# Altium PCB PCB1.PcbDoc
Units mil, origin at the board's own origin, x right, y up, seen from the top; angles counter-clockwise.
Board outline 3500 x 3500 mil, 4 copper layers (Top Layer, Ground 1, Ground 2, Bottom Layer), stack 70.112 mil thick; 73 components, 42 nets, 269 pads, 67 vias.
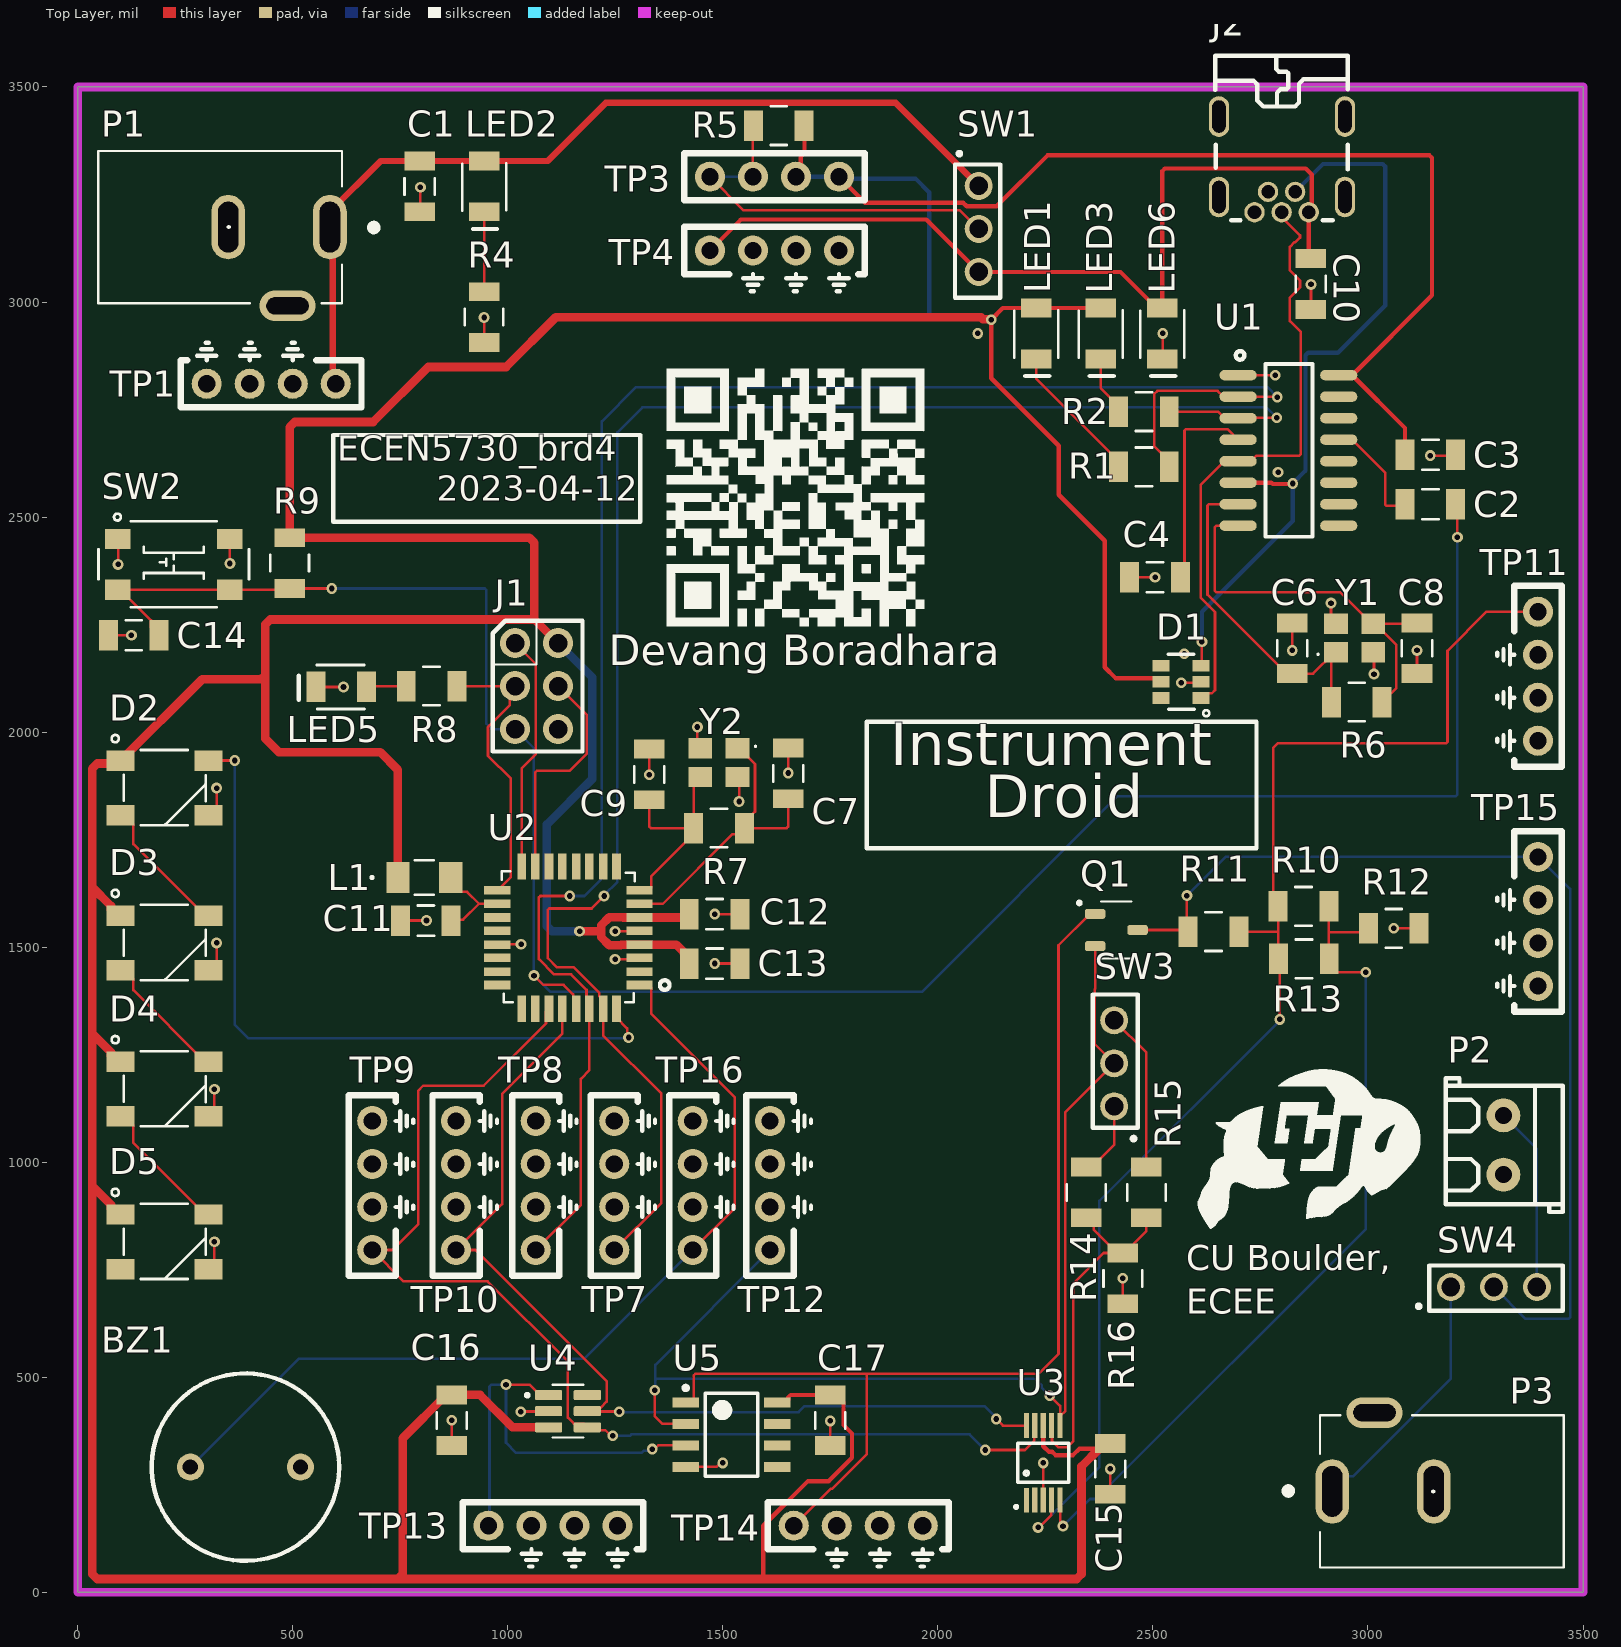
[diagram p0: Top Layer view]
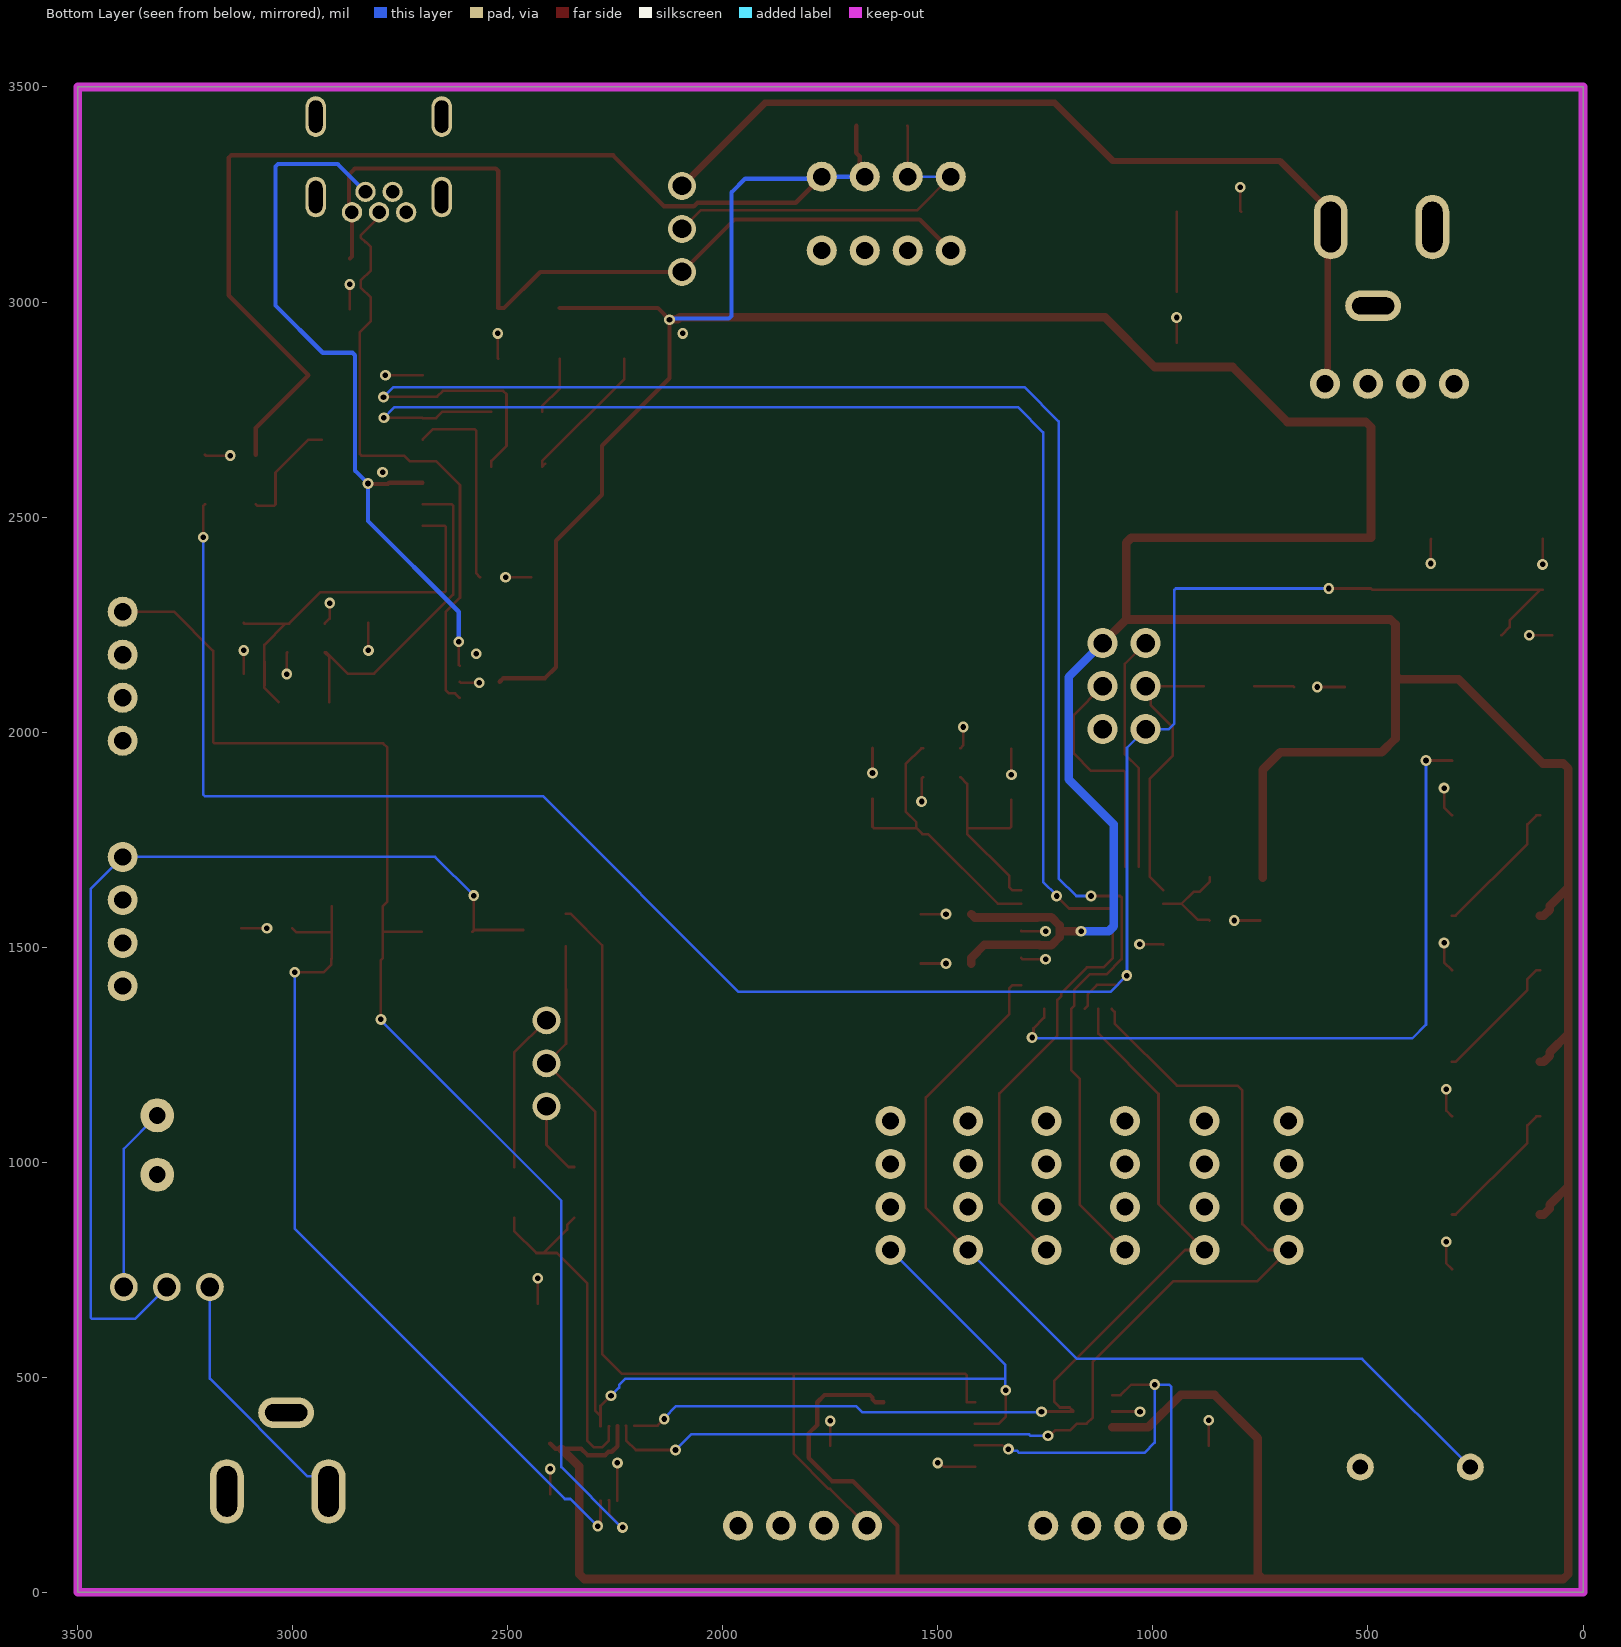
[diagram p1: Bottom Layer view, seen from below]
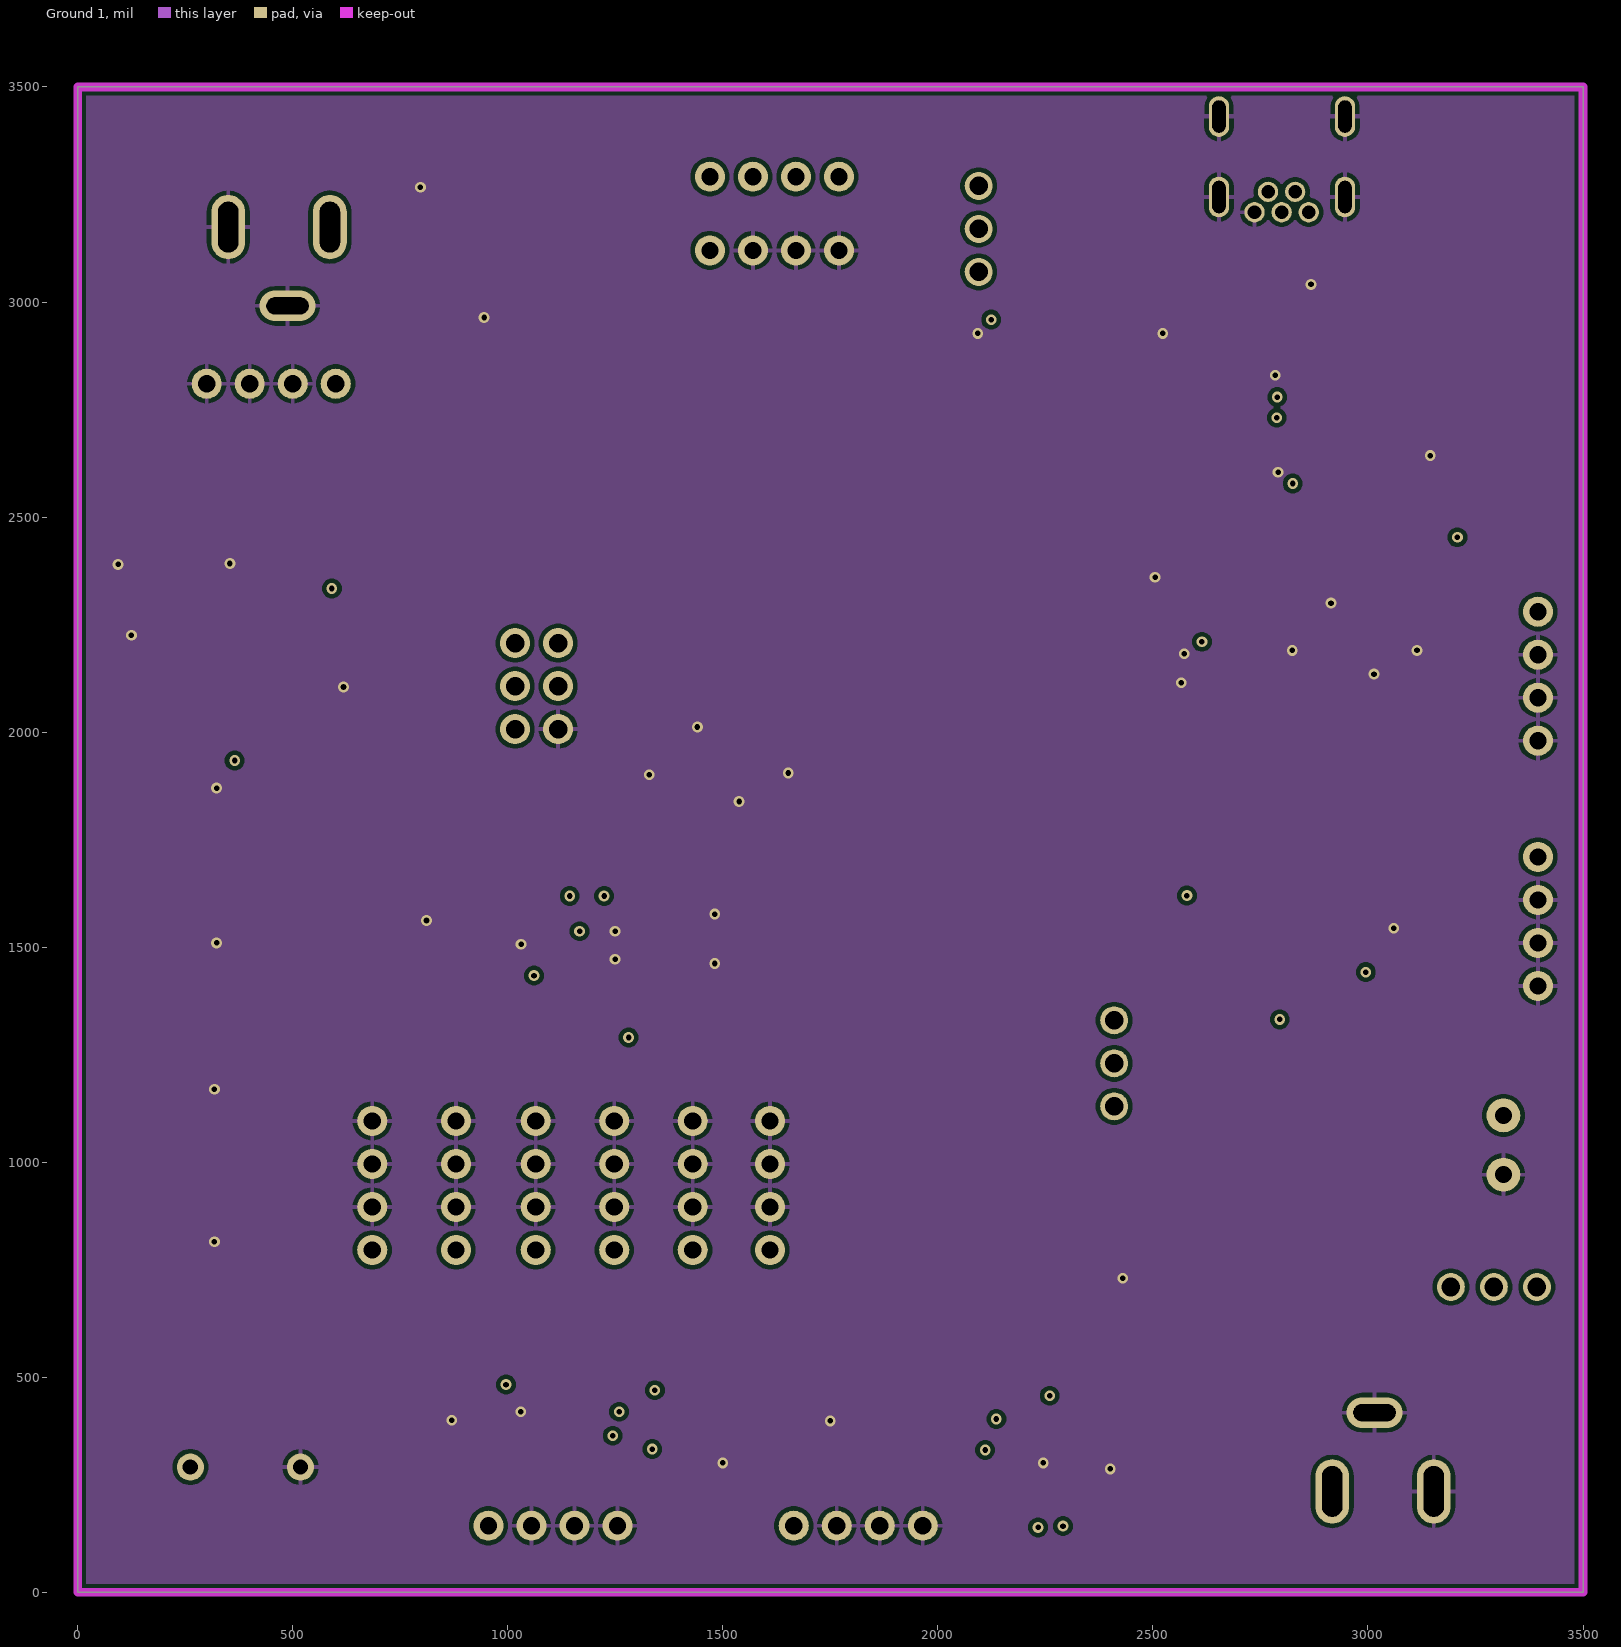
[diagram p2: Ground 1]
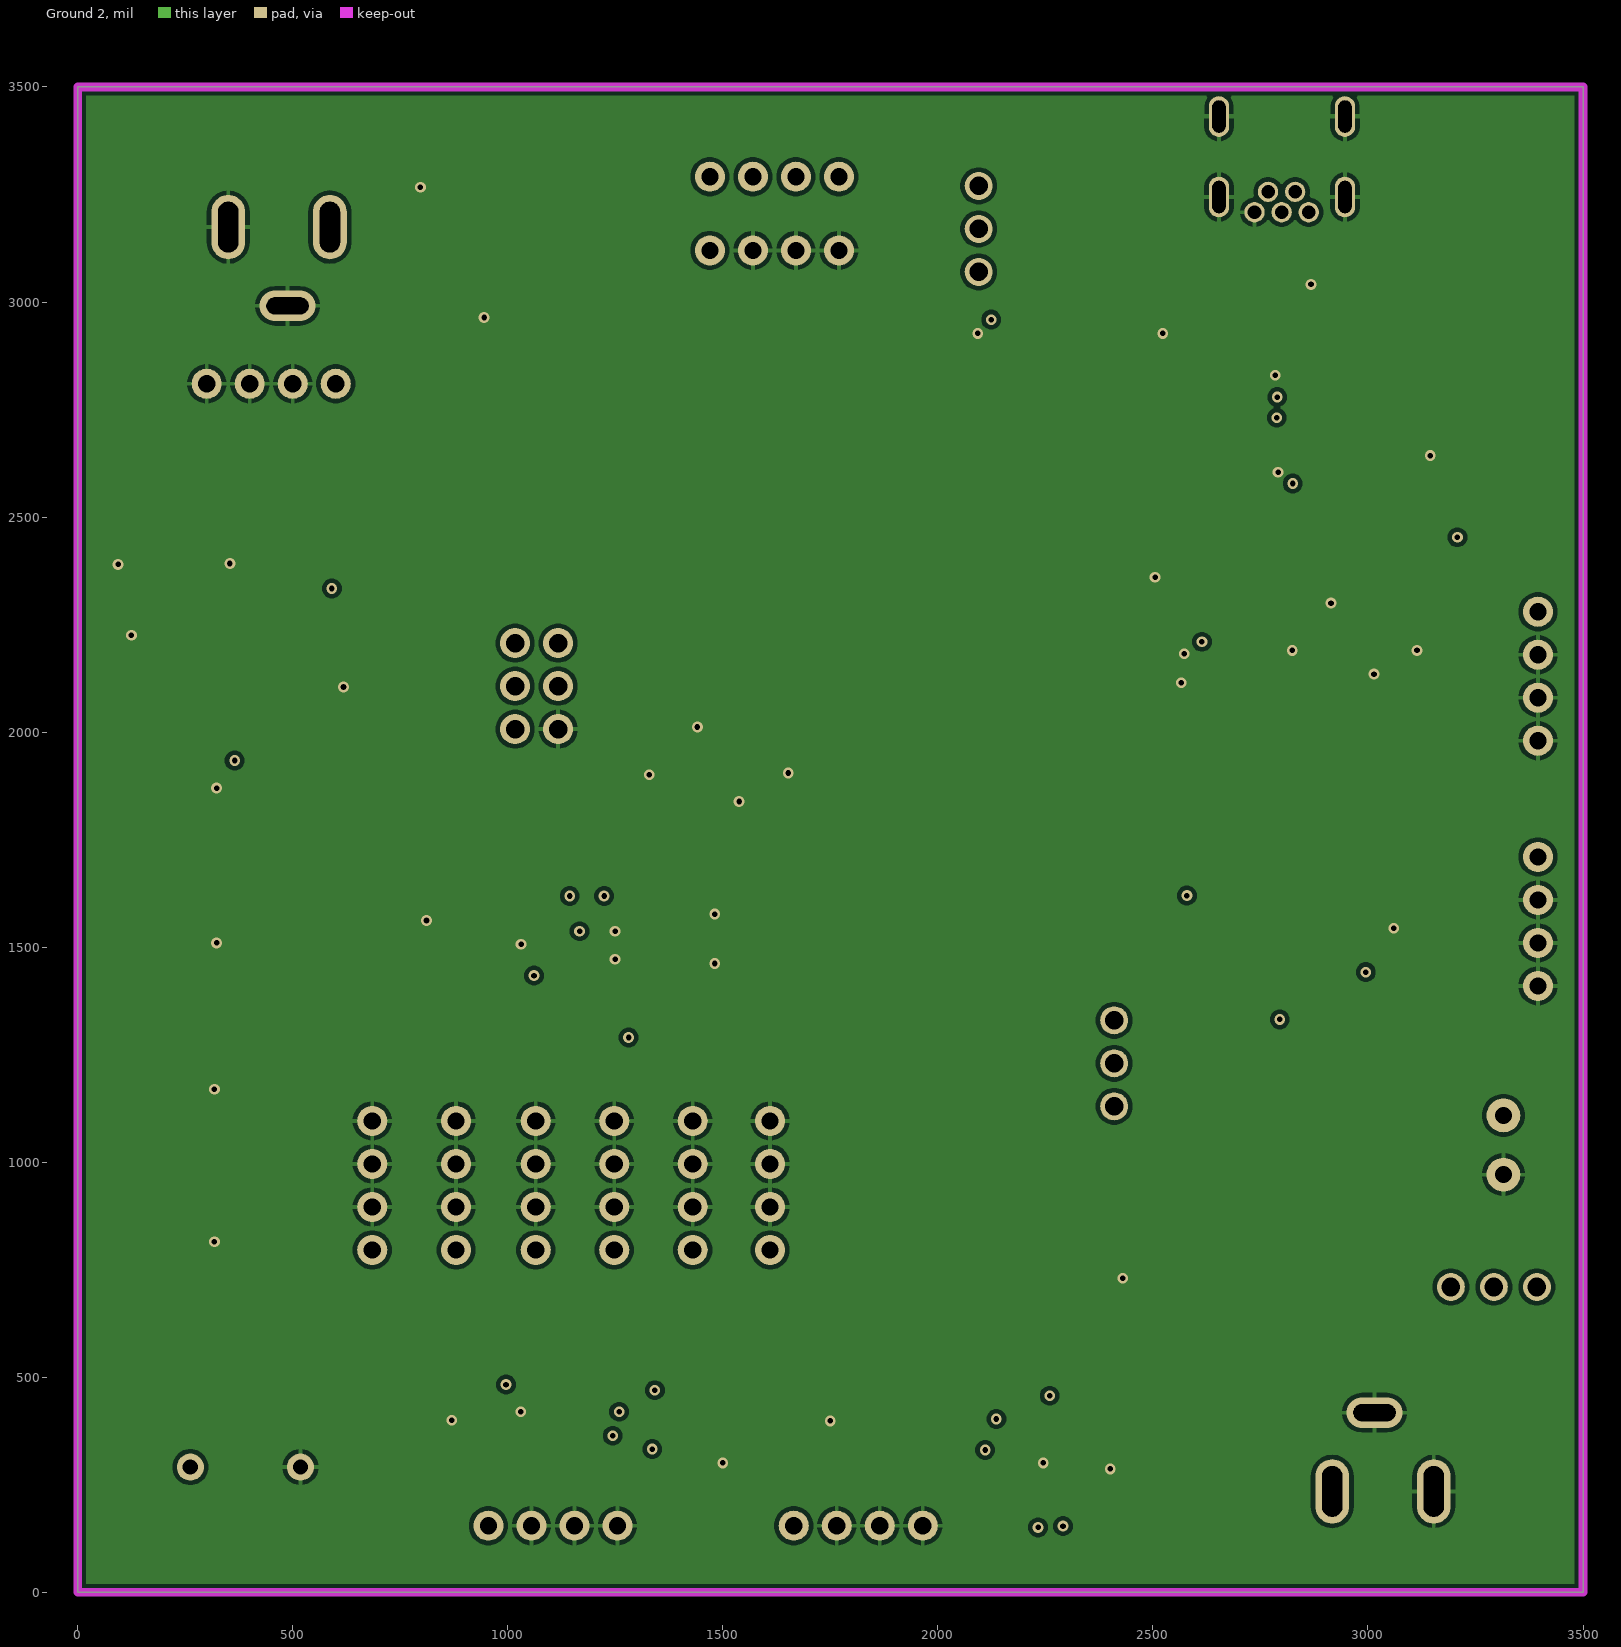
[diagram p3: Ground 2]
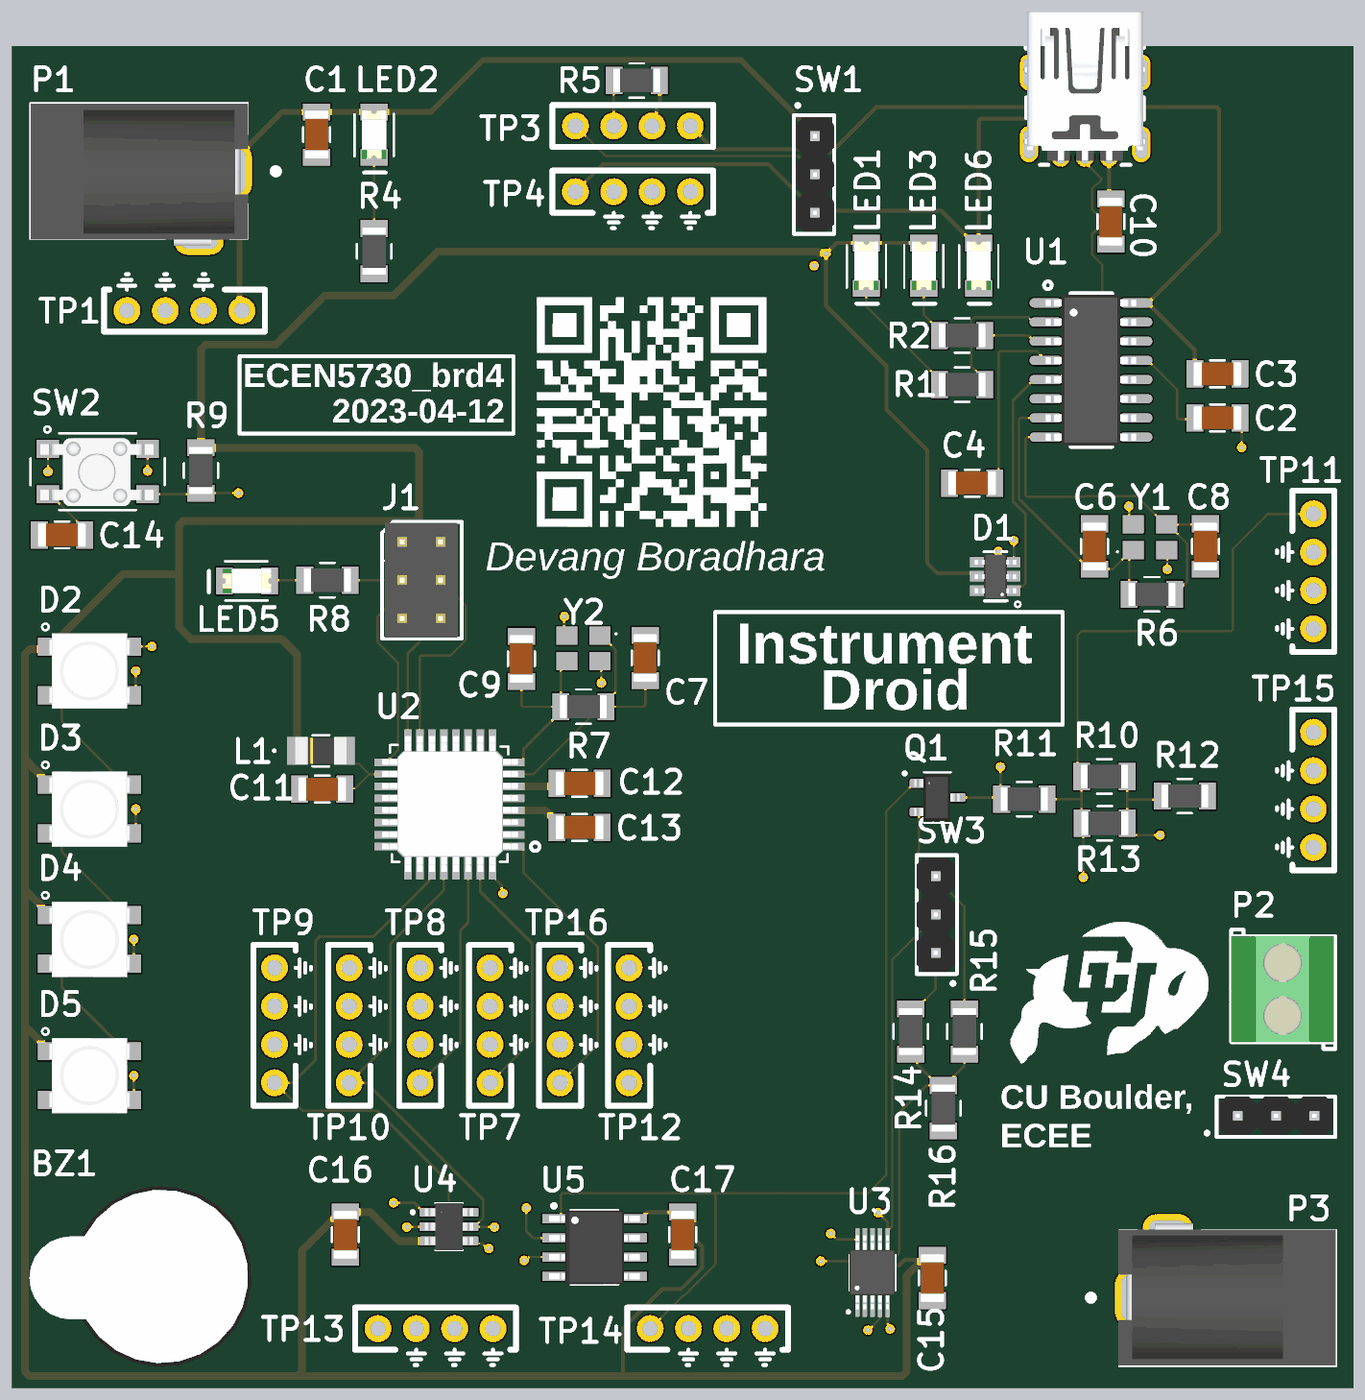
[diagram p4: 3D render of the assembled board from above, using the file's embedded part models]

## Layer stack, top to bottom
Top Solder: solder mask 1, SM-001, Dk 4
Top Layer: signal copper 1.378
Dielectric 2: prepreg 2.8, PP-006, Dk 4.1
Ground 1: signal copper 1.378
Dielectric 1: core 59, Core-043, Dk 4.3
Ground 2: signal copper 1.378
Dielectric 3: prepreg 2.8, PP-006, Dk 4.1
Bottom Layer: signal copper 1.378
Bottom Solder: solder mask 1, SM-001, Dk 4

## Board outline
0,0 3500,0 3500,3500 0,3500

## Design rules (kind name [scope] priority, off if disabled: settings)
BoardOutlineClearance [All] p1: gap=10 ignorepadtopadclearanceinfootprint=FALSE except(0: Arc-SplitContinuation Track-SplitContinuation SMDPad-SplitContinuation THPad-SplitContinuation Via-SplitContinuation Fill-SplitContinuation Poly-SplitContinuation Region-SplitContinuation Text-SplitContinuation)
Clearance [All] p1: gap=10 ignorepadtopadclearanceinfootprint=FALSE except(0: Arc-Hole Track-Hole SMDPad-Hole THPad-Hole Via-Hole Fill-Hole Poly-Hole Region-Hole Text-Hole)
PlaneClearance [All] p1: clearance=10
PlaneConnect [All] p1: planeconnectstyle=Direct reliefexpansion=20 reliefentries=4 reliefconductorwidth=10 reliefairgap=10
PolygonConnect [All] p1: thpad.connectstyle=Relief thpad.reliefconductorwidth=10 thpad.reliefentries=4 thpad.polygonreliefangle="90 Angle" thpad.airgapwidth=10 smdpad.connectstyle=Direct smdpad.reliefconductorwidth=10 smdpad.reliefentries=4 smdpad.polygonreliefangle="90 Angle" smdpad.airgapwidth=10 via.connectstyle=Direct via.reliefconductorwidth=10 via.reliefentries=4 via.polygonreliefangle="90 Angle" via.airgapwidth=10
RoutingVias [All] p1: holewidth=13 width=25 viastyle="Through Hole" minholewidth=13 minwidth=25 maxholewidth=60 maxwidth=80
SolderMaskExpansion [All] p1: expansion=4 istentingtop=FALSE
UnRoutedNet [All] p1: checkbadconnections=TRUE
Width "Schematic Width Constraint_1" [InNet('Vcc')] p1: maxlimit=100 minlimit=10 preferedwidth=20 midlayer1_maxwidth=10 midlayer1_prefwidth=10 midlayer2_maxwidth=10 midlayer2_prefwidth=10 minimp=50.000000 maximp=50.000000 favimp=50.000000
Width "Schematic Width Constraint_3" [InNet('USB_5V')] p2: maxlimit=100 minlimit=10 preferedwidth=20 midlayer1_maxwidth=10 midlayer1_prefwidth=10 midlayer2_maxwidth=10 midlayer2_prefwidth=10 minimp=50.000000 maximp=50.000000 favimp=50.000000
Width "Schematic Width Constraint" [InNet('+5V')] p3: maxlimit=100 minlimit=10 preferedwidth=20 midlayer1_maxwidth=10 midlayer1_prefwidth=10 midlayer2_maxwidth=10 midlayer2_prefwidth=10 minimp=50.000000 maximp=50.000000 favimp=50.000000
Width [All] p4: maxlimit=100 minlimit=6 preferedwidth=6 minimp=50.000000 maximp=50.000000 favimp=50.000000
27 further rules are at their usual default settings.

## Components (designator, comment, footprint, x,y, rotation, side; value= is the part's Value field where it differs from the comment)
BZ1 "AT-1224-TWT-5V-2-R" "BUZZER- TH" 390,291.16 r90 top
C1 "22uF" 1206_Passive_Capacitor 795,3268.94 r90 top
C2 "22uF" 1206_Passive_Capacitor 3145,2530 r180 top
C3 "22uF" 1206_Passive_Capacitor 3145,2645 r0 top
C4 "22uF" 1206_Passive_Capacitor 2505,2360 r180 top
C6 "22pF" 1206_Passive_Capacitor 2824,2195 r90 top
C7 "22pF" 1206_Passive_Capacitor 1652,1904.12 r270 top
C8 "22pF" 1206_Passive_Capacitor 3114,2195 r270 top
C9 "22pF" 1206_Passive_Capacitor 1329,1901.88 r270 top
C10 "10uF" 1206_Passive_Capacitor 2867,3042 r90 top
C11 "22uF" 1206_Passive_Capacitor 809.5,1562 r180 top
C12 "22uF" 1206_Passive_Capacitor 1481,1577 r0 top
C13 "22uF" 1206_Passive_Capacitor 1481,1462 r0 top
C14 "1uF" 1206_Passive_Capacitor 130.47,2225 r0 top
C15 "22uF" 1206_Passive_Capacitor 2401,287 r90 top
C16 "22uF" 1206_Passive_Capacitor 870,400 r90 top
C17 "22uF" 1206_Passive_Capacitor 1750,400 r90 top
D1 "SRV05-4-P-T7" TVS 2566,2117 r180 top value="TVS DIODE 5.5V 6TSOP"
D2 "IN-PI55QATPRPGPBPW" "SERIAL_LED - duplicate" 202.32,1870 r0 top
D3 "IN-PI55QATPRPGPBPW" "SERIAL_LED - duplicate" 202.32,1510 r0 top
D4 "IN-PI55QATPRPGPBPW" "SERIAL_LED - duplicate" 202.32,1170 r0 top
D5 "IN-PI55QATPRPGPBPW" "SERIAL_LED - duplicate" 202.32,815 r0 top
J1 "NRPN032PAEN-RC" ICSP 1017,2207 r0 top
J2 "USB Mini" USB_MINI_B 2800,3320 r180 top value="USB mini B"
L1 "Ferrite Inductor" AIML-1206_ABR-M 806,1662 r0 top
LED1 "White" LED_1206 2229,2927 r270 top
LED2 "Red" LED_1206 945,3268.94 r270 top
LED3 "White" LED_1206 2379,2927 r270 top
LED5 "White" LED_1206 613,2105 r180 top
LED6 "Red" LED_1206 2522,2927 r270 top
P1 "Power Jack" Power_Jack 586.44,3174.27 r180 top value="CONN PWR JACK 2X5.5MM SOLDER"
P2 "2P Screw Terminal Block" "P_Terminal block 3.5mm-pitch" 3315,1040 r270 top
P3 "Power Jack" Power_Jack 2916.83,234.67 r0 top value="CONN PWR JACK 2X5.5MM SOLDER"
Q1 "AO3400A" N-MOSFET 2415,1540 r0 top value="N channel"
R1 "1k" 1206_Passive_Resitor 2479,2617 r0 top value="1K Ohm"
R2 "1k" 1206_Passive_Resitor 2479,2745 r0 top value="1K Ohm"
R4 "1k" 1206_Passive_Resitor 945,2965 r90 top value="1K Ohm"
R5 "500m" 1206_Passive_Resitor 1630,3410 r180 top value=500mOhm
R6 "1M" 1206_Passive_Resitor 2974,2070 r0 top value="1M Ohm"
R7 "1M" 1206_Passive_Resitor 1491,1777 r180 top value="1M Ohm"
R8 "1k" 1206_Passive_Resitor 823,2107 r180 top value="1K Ohm"
R9 "10k" 1206_Passive_Resitor 493,2393 r90 top value=10KOhm
R10 "10k" 1206_Passive_Resitor 2850,1595 r180 top value=10KOhm
R11 "10k" 1206_Passive_Resitor 2641,1536 r180 top value=10KOhm
R12 "0 Ohm" 1206_Passive_Resitor 3060,1544 r180 top
R13 "10k" 1206_Passive_Resitor 2851,1473 r180 top value=10KOhm
R14 "1 Ohm" 1206_Passive_Resitor 2345,930 r90 top value=1Ohm
R15 "10 Ohm" 1206_Passive_Resitor 2485,930 r90 top
R16 "0 Ohm" 1206_Passive_Resitor 2430,730 r270 top
SW1 "PREC003SAAN-RC" 3_PIN_100mil 2095,3270 r270 top value="CONN HEADER VERT 3POS 2.54MM"
SW2 "TL3305AF160QG" Switch_JLC 223.47,2390 r0 top
SW3 "PREC003SAAN-RC" 3_PIN_100mil 2410,1130 r90 top value="CONN HEADER VERT 3POS 2.54MM"
SW4 "PREC003SAAN-RC" 3_PIN_100mil 3192.8,710 r0 top value="CONN HEADER VERT 3POS 2.54MM"
TP1 "TP_5V" TP10x_Probe 450,2810 r180 top
TP3 "Tp_InrushCurrent" TP10x_Floating 1620,3291.44 r0 top
TP4 "TP_USB_Power" TP10x_Probe 1620,3120 r0 top
TP7 "TP_Tx" TP10x_Probe 1247.5,946 r90 top
TP8 "TP_Rx" TP10x_Probe 1065,946 r90 top
TP9 "TP_SDA" TP10x_Probe 685,946 r90 top
TP10 "TP_SCL" TP10x_Probe 880,946 r90 top
TP11 "TP_VRM" TP10x_Probe 3395.3,2130 r270 top
TP12 "TP_R_Sense" TP10x_Probe 1610,946 r90 top
TP13 "TP_Vout_DAC" TP10x_Probe 1105,155 r0 top
TP14 "TP_Vout_OpAmp" TP10x_Probe 1815,155 r0 top
TP15 "TP_V_Thevenin" TP10x_Probe 3395.3,1560 r270 top
TP16 "TP_GPIO_Buzzer" TP10x_Probe 1430,946 r90 top
U1 "CH340G" "USB to serial" 2815,2655 r270 top value="USB to Serial"
U2 "ATMEGA328P-ANR" ATMega328P 1141,1522 r0 top value="IC MCU 8BIT 32KB FLASH 32TQFP"
U3 "ADS1115IDGSR" ADC_ADS1115IDGSR 2245,301 r90 top
U4 "DAC IC" MCP4725 1140,421.12 r0 top
U5 "MCP6002T-I/SN" SOIC127P600X175-8N 1520,366.69 r0 top
Y1 "X322512MSB4SI" "Crystal resonator" 2969,2220.88 r0 top value=12MHz
Y2 "X322516MLB4SI" "Crystal resonator" 1491,1927 r180 top value=16MHz

## Footprints (in the part's own frame and the unit in brackets; to place one, negate y for a bottom-side part, rotate by r counter-clockwise, add the part's x,y. Pads: shape width x height; smd on the part's side, far side on the other; paste and mask are expansions set on the pad)
3_PIN_100mil [mm]
  round 1.65 hole 1.1: 1(0,0) 2(2.54,0) 3(5.08,0)
  silkscreen extent -2,-1.4 6.6,1.27, body extent -1.14,-1.27 6.48,1.27, height 8.38
1206_Passive_Capacitor [mil]
  rect 44x71 smd: 1(-59,0) 2(59,0)
  silkscreen extent -19,-35 19,35, body extent -63,-31 63,32, height 50
1206_Passive_Resitor [mil]
  rect 44x71 smd: 1(-59,0) 2(59,0)
  silkscreen extent -19,-45 19,45, body extent -61,-31 61,31, height 26
ADC_ADS1115IDGSR [mm] "*SOP50P490X110-10N"
  rect 1.45x0.3 smd mask+0.025: 1(-2.2,1)
  rect 1.47x0.3 smd mask+0.025: 2(-2.2,0.5) 3(-2.2,0) 4(-2.2,-0.5) 5(-2.2,-1) 6(2.2,-1) 7(2.2,-0.5) 8(2.2,0) 9(2.2,0.5) 10(2.2,1)
  silkscreen extent -2.68,-1.5 1.15,1.68, body extent -2.44,-1.49 2.46,1.51, height 1.1
AIML-1206_ABR-M [mil]
  rect 54x73 smd paste+0 mask+0: 1(-61.5,0) 2(61.5,0)
  silkscreen extent -124,-40 22,40, body extent -66,-36 66,36, height 55
ATMega328P [mm]
  rect 1.55x0.508 smd mask+0.025: 1(4.2,-2.794) 2(4.2,-2.007) 3(4.2,-1.194) 4(4.2,-0.406) 5(4.2,0.406) 6(4.2,1.194) 7(4.2,2.007) 8(4.2,2.794) 17(-4.2,2.794) 18(-4.2,2.007) 19(-4.2,1.194) 20(-4.2,0.406) 21(-4.2,-0.406) 22(-4.2,-1.194) 23(-4.2,-2.007) 24(-4.2,-2.794)
  rect 0.508x1.55 smd mask+0.025: 9(2.843,4.2) 10(2.056,4.2) 11(1.243,4.2) 12(0.455,4.2) 13(-0.357,4.2) 14(-1.145,4.2) 15(-1.958,4.2) 16(-2.745,4.2) 25(-2.745,-4.2) 26(-1.958,-4.2) 27(-1.145,-4.2) 28(-0.357,-4.2) 29(0.455,-4.2) 30(1.243,-4.2) 31(2.056,-4.2) 32(2.843,-4.2)
  silkscreen extent -3.94,-3.81 5.97,3.94, body extent -4.45,-4.47 4.55,4.53, height 1.16
"BUZZER- TH" [mm]
  round 1.6 hole 0.9: 1(0,3.25) 2(0,-3.25)
  silkscreen extent -5.54,-5.54 5.54,5.53, body extent -6,-6 6,8.75, height 9.05
"Crystal resonator" [mil]
  rect 55.11x47.24 smd: 1(-43.3,-35.43) 2(43.31,-35.43) 3(43.32,31.5) 4(-43.3,31.5)
  silkscreen extent -87,-42 -83,-38, body extent -65,-47 65,47, height 31
ICSP [mil]
  round 70 hole 43.31: 1(0,0) 2(0,-100) 3(0,-200) 4(100,0) 5(100,-100) 6(100,-200)
  silkscreen extent -52,-252 157,52, body extent -44,-250 146,50, height 330
LED_1206 [mil]
  rect 44x71 smd: 1(-59,0) 2(59,0)
  silkscreen extent -54,-51 99,51, body extent -63,-31 63,31, height 28
MCP4725 [mm]
  rrect25% 1.61x0.59 smd: 1(-1.145,0.95) 2(-1.145,0) 3(-1.145,-0.95) 4(1.145,-0.95) 5(1.145,0) 6(1.145,0.95)
  silkscreen extent -2.5,-1.56 0.9,1.56, body extent -1.6,-1.55 1.6,1.55, height 1.45
N-MOSFET [mm]
  rrect50% 1.21x0.59 smd: 1(-1.255,0.95) 2(-1.255,-0.95) 3(1.255,0)
  silkscreen extent -2.28,-1.68 0.89,1.7, body extent -1.55,-1.55 1.45,1.55, height 1.25
"P_Terminal block 3.5mm-pitch" [mm]
  round 2 hole 1: 1(-1.75,0) 2(1.75,0)
  silkscreen extent -3.95,-3.4 3.95,3.5, body extent -3.5,-3.4 3.5,3.4, height 8.4
Power_Jack [mm]
  oval 2x3.8 hole 1.2 slot 3 at 90 deg: 1(0,0) 2(6,0)
  oval 3.3x1.8 hole 1 slot 2.5 at 0 deg: 3(2.5,4.65)
  silkscreen extent -2.79,-4.5 13.68,4.5, body extent -0.76,-4.45 13.64,4.95, height 11.49
"SERIAL_LED - duplicate" [mil] "Footprint for serial LED"
  rect 64.96x47.5 smd: 1(-102.36,63.5) 2(-102.36,-63.5) 3(102.36,-63.5) 4(102.36,63.5)
  silkscreen extent -124,-86 95,124, body extent -106,-98 106,98, height 63
SOIC127P600X175-8N [mm] "SOIC, 8-Leads, Body 4.90x3.90mm, Pitch 1.27mm, IPC Medium Density"
  rect 1.55x0.6 smd: 1(-2.7,1.905) 2(-2.7,0.635) 3(-2.7,-0.635) 4(-2.7,-1.905) 5(2.7,-1.905) 6(2.7,-0.635) 7(2.7,0.635) 8(2.7,1.905)
  silkscreen extent -2.82,-2.45 1.55,2.88, body extent -3,-2.45 3,2.45, height 1.75
Switch_JLC [mm]
  rect 1.5x1.2 smd: 1(-3.3,1.5) 2(3.3,1.5) 3(-3.3,-1.5) 4(3.3,-1.5)
  silkscreen extent -4.44,-2.54 4.45,3, body extent -3.8,-2.29 3.7,2.21, height 3.7
TP10x_Floating [mil] "Small Probs footprint"
  round 70 hole 40: 1(-150,0) 2(-50,0) 3(50,0) 4(150,0)
  silkscreen extent -210,-55 210,55
TP10x_Probe [mil] "Small Probs footprint"
  round 70 hole 40: 1(-150,0) 2(-50,0) 2(50,0) 2(150,0)
  silkscreen extent -210,-95 210,55
TVS [mm]
  rect 1x0.7 smd mask+0.025: 1(-1.162,0.95) 2(-1.162,0) 3(-1.162,-0.95) 4(1.2,-0.95) 5(1.2,0) 6(1.2,0.95)
  silkscreen extent -1.65,-1.63 0.76,2.03, body extent -1.37,-1.44 1.38,1.46, height 1.1
"USB to serial" [mil]
  oval 24x86.61 smd: 1(-175,-117) 2(-125,-117) 3(-75,-117) 4(-25,-117) 5(25,-117) 6(75,-117) 7(125,-117) 8(175,-117) 9(175,117) 10(125,117) 11(75,117) 12(25,117) 13(-25,117) 14(-75,117) 15(-125,117) 16(-175,117)
  silkscreen extent -231,-122 201,56, body extent -197,-118 197,118, height 71
USB_MINI_B [mm]
  round 1.2 hole 0.8: 1(-1.58,2.826) 2(-0.78,1.622) 3(0.02,2.826) 4(0.82,1.622) 5(1.62,2.826)
  oval 1.2x2.4 hole 0.8 slot 1.9 at 90 deg: 6(-3.72,1.924) 7(3.72,1.924) 8(-3.72,-2.826) 9(3.72,-2.826)
  silkscreen extent -3.89,-6.42 3.93,3.3, body extent -4.04,-6.83 4.06,3.02, height 3.98

## Part data
BZ1: library part BUZZER_1, "Buzzers Transducer, Externally Driven Electromechanical/Magnetic 5 V 40mA 2.4kHz 87dB @ 5V, 10cm Through Hole PC Pins", Datasheet=https://www.puiaudio.com/media/SpecSheet/AT-1224-TWT-5V-2-R.pdf, MFR Part #=AT-1224-TWT-5V-2-R
C1 C2 C3 C4 C11 C12 C13 C15 C16 C17: library part C_22uF_1206, "22uF ±10% 25V X5R 1206 Multilayer Ceramic Capacitors MLCC - SMD/SMT RoHS", LCSC Part#=C12891, MFR Part #=CL31A226KAHNNNE, Datasheet=https://datasheet.lcsc.com/lcsc/1811031514_Samsung-Electro-Mechanics-CL31A226KAHNNNE_C12891.pdf, Type=basic
C6 C7 C8 C9: library part C_22pF_1206, "22pF ±5% 1kV C0G 1206 Multilayer Ceramic Capacitors MLCC - SMD/SMT RoHS", LCSC Part#=C313096, MFR Part #=1206CG220J102NT, Datasheet=https://datasheet.lcsc.com/lcsc/1810311150_FH-Guangdong-Fenghua-Advanced-Tech-1206CG220J102NT_C313096.pdf, Type=Extended
C10: library part C_10uF_1206, "10uF ±10% 50V X5R 1206 Multilayer Ceramic Capacitors MLCC - SMD/SMT RoHS", LCSC Part#=C13585, MFR Part #=CL31A106KBHNNNE, Datasheet=https://datasheet.lcsc.com/lcsc/1810221112_Samsung-Electro-Mechanics-CL31A106KBHNNNE_C13585.pdf, Type=Basic
C14: library part C_1uF_1206, "MULTILAYER CERAMIC CAPACITORS MLCC - SMD/SMT 1UF 50V 1206 ROHS", LCSC Part#=C1848, MFR Part #=CL31B105KBHNNNE, Digikey Link=https://www.digikey.com/product-detail/en/C1206C105M4RACTU/399-8150-1-ND/3471873/?itemSeq=304982366, Type=Basic
D1: library part D_TVS_Diode, "TVS SOT-23-6 ROHS", LCSC Part#=C85364, Datasheet=https://datasheet.lcsc.com/szlcsc/ProTek-Devices-SRV05-4-P-T7_C85364.pdf, MFR Part #=SRV05-4-P-T7, Type=Basic
D2 D3 D4 D5: library part LED_Smart, "LIGHT EMITTING DIODES (LED) RGB 620~630NM RED, 520~530NM GREEN, 465~475NM BLUE 600MCD@16MARED,1200MCD@16MAGREEN,300MCD@16MABLUE TOP VIEW SMD-4 ROHS", LCSC Part#=C2761795, Manufacturer=Inolux, MFR Part #=IN-PI55QATPRPGPBPW-60, Datasheet=https://datasheet.lcsc.com/lcsc/2106062036_Worldsemi-WS2812B-B-W_C2761795.pdf
J1: library part J_ICSP, "Connector Header Through Hole 6 position 0.079\" (2.00mm)", LCSC Part#=C124384, Digikey Link=https://www.digikey.com/product-detail/en/NRPN032PAEN-RC/S5801-03-ND/804955/?itemSeq=304982355, MFR Part #=NRPN032PAEN-RC, Type=Extended
J2: library part J_USB_B_Mini, "Through Hole USB Connectors RoHS", LCSC Part#=C46398, MFR Part #=920-462A2021D10102, Datasheet=https://datasheet.lcsc.com/szlcsc/2103081233_Jing-Extension-of-the-Electronic-Co-920-462A2021D10102_C46398.pdf, Type=Extended
L1: library part FB_10uH_1206, "25mA 10uH ±10% 800mΩ 1206  Inductors (SMD) ROHS", LCSC Part#=C1051, MFR Part #=CMI321609X100KT, Mfr_Name="FH (Guangdong Fenghua Advanced Tech)", Datasheet=https://datasheet.lcsc.com/lcsc/1810311314_FH--Guangdong-Fenghua-Advanced-Tech-CMI321609X100KT_C1051.pdf, Type=Basic
LED1 LED3 LED5: library part LED_WHITE_1206, "White light 1206  Light Emitting Diodes (LED) ROHS", LCSC Part#=C130718, MFR Part #=NCD1206W1, Datasheet=https://datasheet.lcsc.com/lcsc/2008201033_Foshan-NationStar-Optoelectronics-NCD1206W1_C130718.pdf, Type=Extended
LED2 LED6: library part LED_RED_1206, "Red 621~631nm 1206 Light Emitting Diodes (LED) RoHS", LCSC Part#=C93133, MFR Part #=15-21/R6C-FQ1R1B/2T, Datasheet=https://datasheet.lcsc.com/szlcsc/1811151241_Everlight-Elec-15-21-R6C-FQ1R1B-2T_C93133.pdf, Type=Extended
P1 P3: library part "P_Power Jack", "Power Barrel Connector Jack 2.10mm ID (0.083\"), 5.50mm OD (0.217\") Through Hole, Right Angle", LCSC Part#=C136744, MFR Part #=PJ-102A, Digikey Link=https://www.digikey.com/product-detail/en/PJ-102A/CP-102A-ND/275425/?itemSeq=304982367, Type=Extended
P2: library part "P_Terminal block", "Green Straight pin 3.5mm  pitch; P=3.5mm  Screw terminal ROHS", LCSC Part#=C474892, Manufacturer="Cixi Kefa Elec", MFR Part #=KF350-3.5-2P, Datasheet=https://datasheet.lcsc.com/lcsc/2001160007_Cixi-Kefa-Elec-KF350-3-5-2P_C474892.pdf
Q1: library part Q_Nch_MOSFET, "MOSFET N Trench 30V 5.7A 1.5V @ 250uA 26.5 m? @ 5.7A,10V SOT-23-3L RoHS", LCSC Part#=C20917, Datasheet=https://datasheet.lcsc.com/szlcsc/Alpha-Omega-Semicon-AOS-AO3400A_C20917.pdf, MFR Part #=AO3400A, Type=Basic
R1 R2 R4 R8: library part R_1K_1206, "CHIP RESISTOR - SURFACE MOUNT 1KOHMS ±1% 1/4W 1206 ROHS", LCSC Part#=C4410, MFR Part #=RNCP1206FTD1K00CT, Digikey Link=https://www.digikey.com/product-detail/en/RNCP1206FTD1K00/RNCP1206FTD1K00CT-ND/2240675/?itemSeq=304982373, Type=Basic
R5: library part R_500mOhm_1206, "Resistors/Shunt 250mW 500mΩ ±800ppm/℃ ±5% 1206  Current Sense  Resistors ROHS", LCSC Part#=C247433, MFR Part #=1206W4J050KT5E, Datasheet=https://datasheet.lcsc.com/lcsc/1810301438_UNI-ROYAL-Uniroyal-Elec-1206W4J050KT5E_C247433.pdf, Type=Extended
R6 R7: library part R_1M_1206, "CHIP RESISTOR - SURFACE MOUNT 1MOHMS ±1% 1/4W 1206 ROHS", LCSC Part#=C17927, MFR Part #=RMCF1206JT1M00, Digikey Link=https://www.digikey.com/product-detail/en/RMCF1206JT1M00/RMCF1206JT1M00CT-ND/1942830/?itemSeq=304982358, Type=Basic
R9 R10 R11 R13: library part R_10KOhm_1206, "10 kOhms ±5% 0.25W, 1/4W Chip Resistor 1206 (3216 Metric) Automotive AEC-Q200 Thick Film", LCSC Part#=C17902, MFR Part #=RMCF1206FT10K0, Digikey Link=https://www.digikey.com/en/products/detail/stackpole-electronics-inc/RMCF1206FT10K0/1759669, Type=Basic
R12 R16: library part R_0Ohm_1206, "CHIP RESISTOR - SURFACE MOUNT 0OHMS ±1% 1/4W 1206 ROHS", LCSC Part#=C17888, MFR Part #=1206W4F0000T5E, Datasheet=https://datasheet.lcsc.com/szlcsc/Uniroyal-Elec-1206W4F0000T5E_C17888.pdf, Mouser link=https://www.mouser.com/ProductDetail/Royalohm/1206W4F0000T5E?qs=e8oIoAS2J1Thbopin%252BsagQ%3D%3D, Type=Basic
R14: library part R_1Ohm_1206, "1Ω ±5% 0.25W ±400ppm/℃ 1206 Chip Resistor - Surface Mount RoHS", LCSC Part#=C1409, MFR Part #=1206W4J010JT5E, Datasheet=https://datasheet.lcsc.com/lcsc/1810301410_UNI-ROYAL-Uniroyal-Elec-1206W4J010JT5E_C1409.pdf, Type=Extended
R15: library part R_10Ohm_1206, "CHIP RESISTOR - SURFACE MOUNT 0.1OHMS ±1% 1/4W 1206 ROHS", LCSC Part#=C17903, MFR Part #=1206W4F100JT5E, Datasheet=https://datasheet.lcsc.com/szlcsc/Uniroyal-Elec-1206W4F100JT5E_C17903.pdf, Type=Basic
SW1 SW3 SW4: library part SW_3Pin_100mil_Switch, "Connector Header Through Hole 3 position 0.100\" (2.54mm)", LCSC Part#=C49257, Digikey Link=https://www.digikey.com/product-detail/en/PREC003SAAN-RC/S1012EC-03-ND/2774851/?itemSeq=304982371, MFR Part #=PREC003SAAN-RC, Type=Extended
SW2: library part SW_Push_Button_JLC, "Tactile Switch SPST-NO Top Actuated Surface Mount", LCSC Part#=C2837550, MFR Part #=KH-4.5X4.5X4.3H-STM, Datasheet=https://datasheet.lcsc.com/lcsc/2106081532_Shenzhen-Kinghelm-Elec-KH-4.5X4.5X4.3H-STM_C2837550.pdf, Type=Extended
TP1 TP4 TP7 TP8 TP9 TP10 TP11 TP12 TP13 TP14 TP15 TP16: library part TP_10x_Probe, "Test Point 300 mil centers"
TP3: library part TP_10x_Floating, "Test Point 300 mil centers"
U1: library part U_USBtoSerial, "Transceiver USB 2.0 2Mbps SOP-16_150mil USB ICs RoHS", LCSC Part#=C14267, Datasheet=https://datasheet.lcsc.com/lcsc/2008191806_WCH-Jiangsu-Qin-Heng-CH340G_C14267.pdf, MFR Part #=CH340G, Type=Basic
U2: library part U_ATMega328P, "AVR AVR® ATmega Microcontroller IC 8-Bit 20MHz 32KB (16K x 16) FLASH 32-TQFP (7x7)", LCSC Part#=C14877, MFR Part #=ATMEGA328P-AU, Digikey Link=https://www.digikey.com/product-detail/en/ATMEGA328P-ANR/ATMEGA328P-ANRCT-ND/2774230/?itemSeq=304982365, Type=Basic
U3: library part U_ADC_ADS1115IDGSR, "16-Bit ADC with Integrated MUX, PGA, Comparator, Oscillator, and Reference 10-VSSOP -40 to 125", LCSC Part#=C37593, Package="MSOP-10 Texas Instruments", Digikey Link=https://www.digikey.com/product-detail/en/texas-instruments/ADS1115IDGSR/296-38849-1-ND/5142969?utm_source=snapeda&utm_medium=aggregator&utm_campaign=symbol, MFR Part #=ADS1115IDGSR, SnapEDA_Link=https://www.snapeda.com/parts/ADS1115IDGSR/Texas%20Instruments/view-part/?ref=snap, Type=Extended
U4: library part U_MCP4725A0T-E/CH, "IC DAC 12BIT V-OUT SOT23-6", LCSC Part#=C144198, MFR Part #=MCP4725A0T-E/CH, Datasheet=https://ww1.microchip.com/downloads/en/DeviceDoc/22039d.pdf, Type=Extended
U5: library part U_MCP6002T-I/SN, "0.6 V/us 2 1MHz 1.8V ~ 6V 100μA General Purpose SOIC-8_150mil  Operational Amplifier ROHS", LCSC Part#=C7377, Mfr=Microchip, Datasheet=https://ww1.microchip.com/downloads/en/DeviceDoc/MCP6001-1R-1U-2-4-1-MHz-Low-Power-Op-Amp-DS20001733L.pdf, MFR Part #=MCP6002T-I/SN, Type=Basic
Y1: library part X_12MHz_Res, "SMD Crystal Resonators 12MHz ±10ppm SMD-3225_4P RoHS", LCSC Part#=C9002, Datasheet=https://datasheet.lcsc.com/szlcsc/Yangxing-Tech-X322512MSB4SI_C9002.pdf, MFR Part #=X322512MSB4SI, Type=Basic
Y2: library part X_16Mhz_Res, "±10ppm 16000000Hz -40℃~85℃ 贴片无源晶振 60Ω 9pF SMD3225-4P Crystals ROHS", LCSC Part#=C13738, MFR Part #=X322516MLB4SI, Type=Basic

## Via types
v1: diameter 25, hole 13, Top Layer to Bottom Layer, 67 vias

## Nets (pads, with @x,y where several pads share a name; then routed paths per layer and width w, separated by ;. In a path a pad name is that pad's centre, name@x,y a point inside that pad or via, vN(x,y) a via of type N, cw(c..) or ccw(c..) an arc to the next point about the centre after c; other vN are vias at no path point)
12MHz_OSC1: C6.1 R6.1 U1.7 Y1.1 | length 794.5
  Top Layer w6: U1.7 2630.51,2530 2627,2526.49 2627,2319.5 2810.5,2136 C6.1 2872.31,2136 2921.76,2185.45 Y1.1 2915,2174.75 R6.1
12MHz_OSC2: C8.1 R6.2 U1.8 Y1.3 | length 922.9
  Top Layer w6: U1.8 2647.51,2480 2644,2476.49 2644,2328.64 2647.51,2325.13 2797.51,2325.13 2797.88,2325.5 2935.26,2325.5 3008.38,2252.38 Y1.3 Y1.3@3016.25,2252.38 ; R6.2 3066,2103 3066,2108.12 3065.5,2108.62 3065.5,2163.38 3066,2163.88 3066,2202.63 Y1.3@3016.25,2252.38 ; C8.1 3112.38,2252.38 Y1.3@3016.25,2252.38
16MHz_OSC_1: C7.2 R7.1 U2.7 Y2.1 | length 699.4
  Top Layer w6: U2.7 1360.68,1601 1522.51,1762.83 1535.83,1762.83 R7.1 ; Y2.1 1538.24,1962.43 1574.86,1925.81 1574.86,1815.36 1550,1790.5 R7.1 ; C7.2 1652,1780.51 1648.49,1777 R7.1
16MHz_OSC_2: C9.2 R7.2 U2.8 Y2.3 | length 500.9
  Top Layer w6: U2.8 1326.87,1632 1333.87,1639 1333.87,1665.37 1432,1763.5 R7.2 ; C9.2 1329,1780.51 1332.51,1777 R7.2 ; Y2.3 1432,1879.82 R7.2
+5V: C1.2 LED2.1 P1.1 SW1.1 TP1.1 | length 2098.7
  Top Layer w15: TP1.1 593.22,2816.78 593.22,3167.49 P1.1 586.44,3209.7 704.67,3327.94 C1.2 LED2.1 1092.94,3327.94 1228,3463 1902,3463 SW1.1
AD4/SDA: TP9.1 U2.27 U3.9 U4.4 | length 2695.7
  Top Layer w6: U2.27 1088.93,1349.65 1088.93,1322.75 944.18,1178 803.51,1178 792,1166.49 792,856 732,796 TP9.1 758,723 953,723 1139.61,536.39 1139.61,406.6 1153.88,392.33 1176.46,392.33 1191.71,377.09 1226.68,377.09 1239.77,364 v1(1244,364) ; v1(2110,331) 2202.24,331 2224.54,353.29 2224.54,386.83 U3.9
  Bottom Layer w6: v1(1244,364) 1284.1,364 1287.6,367.5 2073.5,367.5 v1(2110,331)
AD5/SCL: TP10.1 U2.28 U3.10 U4.5 | length 2288.3
  Top Layer w6: U2.28 1126.93,1298.93 987,1159 987,903 TP10.1 925,796 1229.77,491.23 1229.77,443.23 1216.28,429.74 1193.69,429.74 U4.5 1185.64,420.56 1258.44,420.56 v1(1259,420) ; v1(2136,403) 2151.39,387.61 U3.10
  Bottom Layer w6: v1(1259,420) 1260,419 1676.07,419 1690.07,433 2108.49,433 2136,405.49 v1(2136,403)
D+: D1.1 J2.3 U1.5 | length 1414.4
  Top Layer w6: D1.1 2622.39,2090.22 2636.84,2090.22 2644.45,2097.84 2644.45,2279.42 2611,2312.87 2611,2574.31 2666.69,2630 2728.03,2630 2741.03,2643 2840.49,2643 2844,2646.51 2844,2930.12 2818.5,2955.62 2818.5,3010.38 2842,3033.88 2842,3050.12 2818.5,3073.62 2818.5,3128.38 2829.22,3139.11 2831.28,3139.11 2842,3149.83 2842,3154.8 2799.22,3197.59 J2.3
D-: D1.3 J2.2 U1.6 | length 1745.9
  Top Layer w6: D1.3 2614,2156.63 v1(2614,2210)
  Top Layer w10: U1.6 2775.42,2580 2778.42,2577 2824,2577 v1(2825,2578)
  Bottom Layer w10: v1(2614,2210) 2614,2280 2825,2491 v1(2825,2578) 2855,2608 2855,2876.14 2860.86,2882 2930,2882 3040,2992 3040,3315.14 3034.14,3321 2895.58,3321 J2.2
GND: BZ1.2 C1.1 C3.2 C4.2 C6.2 C7.1 C8.2 C9.1 C10.1 C11.2 C12.2 C13.2 C14.1 C15.1 C16.1 C17.1 D1.2 D2.3 D3.3 D4.3 D5.3 J1.6 J2.5 J2.6 J2.7 J2.8 J2.9 LED5.2 LED6.2 P1.2 P1.3 P2.2 P3.2 P3.3 R4.1 R12.1 R16.2 SW2.1 SW2.2 TP1.2 TP4.2 TP7.2 TP8.2 TP9.2 TP10.2 TP11.2 TP12.2 TP13.2 TP14.2 TP15.2 TP16.2 U1.1 U2.3 U2.5 U2.21 U3.3 U4.2 U5.4 Y1.2 Y1.4 Y2.2 Y2.4 | length 2336.1
  Top Layer w6: C14.1 v1(125,2225) ; SW2.1 94,2448.61 v1(94,2390) ; D5.3 318,764.82 v1(318,815) ; D4.3 318,1119.82 v1(318,1170) ; D3.3 323,1464.82 v1(323,1510) ; D2.3 323,1824.82 v1(323,1870) ; SW2.2 354,2448.45 v1(354,2392) ; LED5.2 v1(618,2105) ; C11.2 v1(811,1562) ; C1.1 797,3211.94 v1(797,3267) ; C16.1 v1(870,400) ; R4.1 v1(945,2964) ; U2.21 976.65,1507 v1(1031,1507) ; v1(1030,420) 1030.56,420.56 1094.36,420.56 U4.2 ; v1(1249.5,1472) 1303.35,1472 U2.3 ; v1(1249.5,1537) 1305.35,1537 U2.5 ; v1(1329,1901) C9.1 ; U5.4 1485.55,291.69 1494.86,301 v1(1500,301) ; v1(1441,2012) 1441,1969.12 Y2.2 ; v1(1481,1462) C13.2 ; v1(1481,1577) C12.2 ; Y2.4 1537.78,1892.02 v1(1537.78,1838.78) ; v1(1652,1905) C7.1 ; C17.1 v1(1750,398.5) ; U3.3@2245,213.39 v1(2245,301) ; C15.1 v1(2401,287) ; R16.2 v1(2430,730) ; C4.2 v1(2505,2360) ; LED6.2 2523,2869 v1(2523,2927) ; v1(2566,2115) 2609.77,2115 D1.2 ; U1.1 v1(2784.5,2830) ; v1(2824,2190) C6.2 ; C10.1 2867.5,2983.5 v1(2867.5,3041) ; v1(2914,2300) 2914,2264.08 Y1.4 ; Y1.2 3014,2183.76 v1(3014,2135) ; v1(3060,1544) R12.1 ; C8.2 v1(3114,2190) ; v1(3145,2643) 3202,2643 C3.2
  other v1: 2573,2182 2791,2604.5 2093,2927
GPIO_BUZZER: BZ1.1 TP16.1 U2.1 | length 2137.5
  Top Layer w6: U2.1 1326.87,1412 1333.87,1405 1333.87,1345.13 1528,1151 1528,894 TP16.1
  Bottom Layer w6: BZ1.1 513.8,542.91 1176.91,542.91 TP16.1
GPIO_LED: D2.4 U2.32 | length 1682.9
  Top Layer w6: D2.4 305.18,1934 v1(365,1934) ; U2.32 1252.93,1336.13 1277.56,1311.5 1277.56,1293.44 v1(1281,1290)
  Bottom Layer w6: v1(365,1934) 365,1320 397,1288 1279,1288 v1(1281,1290)
MISO: J1.1 U2.16 | length 552.8
  Top Layer w6: J1.1 1065,2159 1065,1948.18 1032.93,1916.11 U2.16
MOSI: J1.5 U2.15 | length 542
  Top Layer w6: U2.15 1063.93,1906.49 1067.44,1910 1144,1910 1184,1950 1184,2040 J1.5
NetC2_2: C2.2 U1.13 | length 262.7
  Top Layer w6: U1.13 2963.31,2680 3040,2603.31 3040,2529.51 3043.51,2526 3082,2526 C2.2
NetC4_1: C4.1 U1.4 | length 481
  Top Layer w6: C4.1 2573.48,2369.48 2573.48,2700.97 2577,2704.48 2673.52,2704.48 U1.4
NetC11_1: C11.1 L1.2 U2.18 | length 219.6
  Top Layer w6: L1.2 867.5,1652.5 891.5,1628.5 905.5,1628.5 933,1601 ; C11.1 870.49,1563.99 895.99,1563.99 933,1601 ; U2.18 933,1601
NetD2_2: D2.2 D3.4 | length 328
  Top Layer w6: D2.2 108.68,1806.5 129.43,1785.75 129.43,1740.01 295.95,1573.5 D3.4
NetD3_2: D3.2 D4.4 | length 308
  Top Layer w6: D3.2 108.68,1446.5 129.43,1425.75 129.43,1400.01 295.95,1233.5 D4.4
NetD4_2: D4.2 D5.4 | length 323
  Top Layer w6: D4.2 108.68,1106.5 129.43,1085.75 129.43,1045.01 295.95,878.5 D5.4
NetLED1_2: LED1.2 R1.1 | length 340
  Top Layer w6: LED1.2 2229,2821.5 2420,2630.5 R1.1 R1.1@2413,2624
NetLED2_2: LED2.2 R4.2 | length 185.9
  Top Layer w6: R4.2 LED2.2
NetLED3_2: LED3.2 R2.1 | length 140.4
  Top Layer w6: LED3.2 2379,2799.5 2420,2758.5 R2.1 R2.1@2419.7,2745.3
NetLED5_1: LED5.1 R8.2 | length 92.8
  Top Layer w6: LED5.1 674,2107 R8.2
NetP2_1: P2.1 SW4.3 | length 431.1
  Bottom Layer w6: P2.1 3392.8,1031.1 SW4.3
NetP3_1: P3.1 SW4.1 | length 598.3
  Bottom Layer w6: P3.1 2916.83,236.06 2950.43,269.66 2965.2,269.66 3192.8,497.25 SW4.1
NetQ1_3: Q1.3 R11.2 SW4.2 TP15.1 | length 2366
  Top Layer w6: Q1.3 2578,1540 R11.2@2580,1538 ; v1(2579,1620) 2579,1539 R11.2@2580,1538 ; R11.2 R11.2@2580,1538
  Bottom Layer w6: v1(2579,1620) 2669,1710 TP15.1 3470,1635.3 3470,639.51 3466.49,636 3366.8,636 SW4.2
NetR5_2: R5.2 SW1.2 TP3.1 TP3.2 | length 894.3
  Top Layer w6: TP3.1 1548.44,3213 2051.34,3213 2094.34,3170 SW1.2 ; TP3.2 1570,3409 R5.2
  Bottom Layer w6: TP3.1 TP3.2
NetR14_2: R14.2 SW3.1 | length 175.8
  Top Layer w6: R14.2 2358.5,989 2410,1040.5 SW3.1
NetR15_2: R15.2 SW3.3 | length 372.1
  Top Layer w6: SW3.3 2485,1255 R15.2
R_Sense_+: Q1.2 SW3.2 TP12.1 U3.6 U5.2 | length 2760.7
  Top Layer w6: v1(1342,470) 1342,409 1359.31,391.69 U5.2 ; v1(2260,457) 2260.86,457 2284.37,433.49 U3.6@2284.37,409.65 ; U3.6@2284.37,386.61 U3.6@2284.37,409.65 ; Q1.2 2365.59,1403.22 2364.52,1402.14 2364.52,1275.48 SW3.2 2296.5,1116.5 2296.5,421.78 U3.6@2284.37,409.65
  Bottom Layer w6: v1(1342,470) 1343,471 1343,493.44 ; TP12.1 1343,529 1343,493.44 ; v1(2260,457) 2241.2,475.8 2241.2,481.8 2226.04,496.96 1346.51,496.96 1343,493.44
R_Sense_-: R14.1 R15.1 R16.1 U3.7 | length 825.6
  Top Layer w6: U3.7@2264.68,386.61 2265.46,385.83 2265.46,352.29 2280.76,337 2299.58,337 2315,352.42 2315,718.5 2385.5,789 R16.1@2416.5,789 ; R14.1 2361.99,854.01 2361.99,843.51 R16.1@2416.5,789 ; R15.1 2485,840.5 2433.5,789 R16.1 R16.1@2416.5,789
Reset: C2.1 C14.2 J1.3 R9.1 SW2.3 SW2.4 U2.29 | length 5152
  Top Layer w6: SW2.3 SW2.3@99.46,2330.95 ; C14.2 170.47,2244 170.47,2259.93 SW2.3@99.46,2330.95 ; v1(591,2334) R9.1 489.94,2330.95 SW2.4 SW2.3@99.46,2330.95 ; v1(1061,1434) 1082.55,1412.45 1130.02,1412.45 1151.93,1390.54 1151.93,1363.65 U2.29 ; C2.1 3208,2526 v1(3208,2453)
  Bottom Layer w6: v1(591,2334) 946.49,2334 950,2330.49 950,2020 963,2007 J1.3 1060.3,1963.7 1060.3,1434.7 v1(1061,1434) 1099,1396 1963,1396 2418,1851 3204.49,1851 3208,1854.51 v1(3208,2453)
RXD: R1.2 TP8.1 U1.2 U2.30 | length 4261.1
  Top Layer w6: TP8.1 1170,901 1170,1194 1189.93,1213.93 U2.30 1183,1363.57 1183,1401 1147,1437 1108.06,1437 1072.49,1472.58 1072.49,1615.49 1076,1619 v1(1144,1619) ; R1.2 2538,2630.5 2503,2665.5 2503,2785.88 2510.62,2793.5 2650.49,2793.5 2663.99,2780 U1.2 2698.5,2779.5 2788.5,2779.5 v1(2789,2779)
  Bottom Layer w6: v1(1144,1619) 1178,1619 1219,1660 1219,2722.49 1298.51,2802 2766,2802 v1(2789,2779)
SCK: J1.2 R8.1 U2.17 | length 671
  Top Layer w6: R8.1 J1.2 1005.12,2095.12 1005.12,2063 954,2011.88 954,1945 1007,1892 1007,1663.35 U2.17
TXD: R2.2 TP7.1 U1.3 U2.31 | length 4026.9
  Top Layer w6: v1(1224,1619) 1195,1590 1096.51,1590 1093,1586.49 1093,1474.69 1114.69,1453 1153.63,1453 1212.93,1393.7 1212.93,1386.16 1221.93,1377.16 U2.31 1221.93,1295.07 1357,1160 1357,905.5 TP7.1 ; R2.2 2651.69,2745 2666.69,2730 U1.3 2698.5,2730.5 2787.5,2730.5 v1(2788,2731)
  Bottom Layer w6: v1(1224,1619) 1224,1621.01 1255,1652.01 1255,2697 1313,2755 2764,2755 v1(2788,2731)
USB_5V: C10.2 J2.1 LED6.1 SW1.3 TP4.1 | length 2042
  Top Layer w10: TP4.1 1542,3192 1973,3192 SW1.3 2424.5,3070 2508.5,2986 LED6.1 2522,3304.72 2527.86,3310.57 2855.43,3310.57 2869.34,3296.66 2869.34,3225.96 2862.2,3218.82 J2.1 2862.2,3105.8 C10.2
Vcc: C3.1 C12.1 C13.1 C15.2 C16.2 C17.2 D1.5 D2.1 D3.1 D4.1 D5.1 J1.4 L1.1 LED1.1 LED3.1 R5.1 R9.2 TP3.3 TP3.4 U1.16 U2.4 U2.6 U3.8 U4.3 U5.8 | length 17099.5
  Top Layer w10: 1594,31 1594,154.71 1697.91,258.62 1746.33,258.62 1800.5,312.79 1800.5,369.21 1780.5,389.21 1780.5,442 1763.5,459 C17.2 1657.67,459 1651.81,453.14 1651.81,448.5 1645,441.69 U5.8 ; TP3.3 1681.48,3302.92 1681.48,3338.48 1690,3347 1690,3409 R5.1 ; TP3.4 1830.44,3231 2058.79,3231 2067.27,3222.52 2136.52,3222.52 2255,3341 3143.14,3341 3149,3335.14 3149,3015.69 2963.31,2830 3086,2707.31 C3.1 ; U3.8@2245,386.61 2245,339.86 2258.18,326.68 2265.62,326.68 2273.3,319 2314.4,319 2329.4,334 2375.5,334 2389,334 C15.2 ; LED3.1 LED1.1 2151,2986 v1(2124,2959) 2124,2823 2281,2666 2281,2552 2388,2445 2388,2151 2413.38,2125.62 2510.13,2125.62 D1.5
  Top Layer w20: D5.1 91.22,878.5 77.47,892.25 77.47,900.98 34,944.45 ; D4.1 91.22,1233.5 77.47,1247.25 77.47,1255.98 34,1299.45 ; D3.1 91.22,1573.5 77.47,1587.25 77.47,1595.98 34,1639.45 ; L1.1 744.5,1912.5 704,1953 468,1953 436,1985 436,2132 ; U4.3 1010.78,383.72 935.5,459 856.5,459 756,358.5 756,42.72 744.28,31 ; J1.4 1062,2262 ; v1(1167,1537) 1217,1537 ; C13.1 1422,1475.5 1391.5,1506 U2.4 1264.46,1506 1262.96,1504.5 1236.04,1504.5 1217,1523.54 1217,1537 ; C12.1 1414,1569 U2.6 1269,1569 1268.5,1569.5 1236.04,1569.5 1217,1550.46 1217,1537 ; v1(2124,2959) 2123.04,2959.96 2105.01,2959.96 2100.46,2964.5 1111.5,2964.5 996,2849 815,2849 687,2721 504.72,2721 493,2709.28 R9.2 1050.28,2452 1062,2440.28 1062,2262 ; C15.2@2375.5,334 2334,292.5 2334,42.72 2322.28,31 1594,31 744.28,31 ; 34,944.45 34,42.72 45.72,31 744.28,31 ; 34,944.45 34,1299.45 ; 34,1299.45 34,1639.45 ; 34,1639.45 34,1915.28 45.72,1927 93.45,1927 289.45,2123 427,2123 436,2132 ; 436,2132 436,2250.28 447.72,2262 1062,2262
  Bottom Layer w10: TP3.3 TP3.4 1774.44,3287 1948,3287 1980,3255 1980,2967.73 1985.86,2961.87 2121.13,2961.87 v1(2124,2959)
  Bottom Layer w20: J1.4 1196,2128 1196,1890.24 1091,1785.24 1091,1548.72 1102.72,1537 v1@1165.65,1537
Vout_DAC: TP13.1 U4.1 U5.3 | length 1043.8
  Top Layer w6: v1(996,483) 1050.37,483 1074.84,458.52 U4.1 ; v1(1336,333) 1341.14,333 1350.14,342 1413.39,342 U5.3
  Bottom Layer w6: TP13.1 957.5,157.5 957.5,478.5 962,483 v1(996,483) 996,348 1019.5,324.5 1311.5,324.5 1316.36,329.36 1332.36,329.36 v1(1336,333)
Vout_OpAmp: Q1.1 TP14.1 U5.1 | length 2440.9
  Top Layer w6: U5.1 1432.4,441.69 1432.4,504.49 1435.92,508 1834.96,508 ; TP14.1 1750.62,240.62 1753.79,240.62 1834.96,321.79 1834.96,508 ; Q1.1 2353.39,1577.4 2280.5,1504.52 2280.5,554.5 2234,508 1834.96,508
VRM_+: R10.2 R11.1 R13.2 TP11.1 U3.4 | length 3092.5
  Top Layer w6: v1(2233,151) 2234.84,151 2263.91,180.06 2263.91,213.61 U3.4 ; R11.1 2789.5,1536 2791,1534.5 ; v1(2795,1332) 2795,1470 2791,1474 2791,1534.5 ; TP11.1 3276,2280 3185,2189 3185,1977.51 3181.49,1974 2790,1974 2780,1964 2780,1606 R10.2 2791,1534.5
  Bottom Layer w6: v1(2233,151) 2235,151 2375.5,291.5 2375.5,910.5 2795,1330 v1(2795,1332)
VRM_-: R10.1 R12.2 R13.1 U3.5 | length 1973.5
  Top Layer w6: U3.5@2284.37,213.39 2284.37,165.77 2291,159.14 v1(2291,154) ; R10.1 2909,1534.5 ; v1(2995,1442) 2927.5,1442 2910,1459.5 R13.1 2909,1474 2909,1534.5 ; R12.2 2991.5,1534.5 2909,1534.5
  Bottom Layer w6: v1(2291,154) 2354.04,217.04 2367.1,217.04 2995,844.94 v1(2995,1442)
pads on no net: D1.4 D1.6 D5.2 J2.4 U1.9 U1.10 U1.11 U1.12 U1.14 U1.15 U2.2 U2.9 U2.10 U2.11 U2.12 U2.13 U2.14 U2.19 U2.20 U2.22 U2.23 U2.24 U2.25 U2.26 U3.1 U3.2 U4.6 U5.5 U5.6 U5.7

## Polygon pours and split planes (outlines as drawn)
GND on Ground 1 "GND_L02_P000" (solid, pour order 0): 0,3500 3500,3500 3500,0 0,0
GND on Ground 2 "GND_L03_P001" (solid, pour order 1): 0,3500 3500,3500 3500,0 0,0

## Keep-outs
Keep-Out Layer:
  the board outline again, w20

## Silkscreen, mask and mechanical layers (free items; w line width, h text height)
Top Overlay:
  drawing of 29 lines, arcs and shapes, not listed
  text "ECEN5730_brd4" at 603,2610.67 h100
  text "2023-04-12" at 835,2518.17 h100
  text "Devang Boradhara" at 1235,2132.25 h120
  text "Instrument" at 1889,1889.99 h170
  text "Droid" at 2109,1768.99 h170
  text "CU Boulder," at 2578,728.86 h100
  text "ECEE" at 2578,628.17 h100